# EAGLE board bin-to-dec_tube-driver (EAGLE 9.6.2)
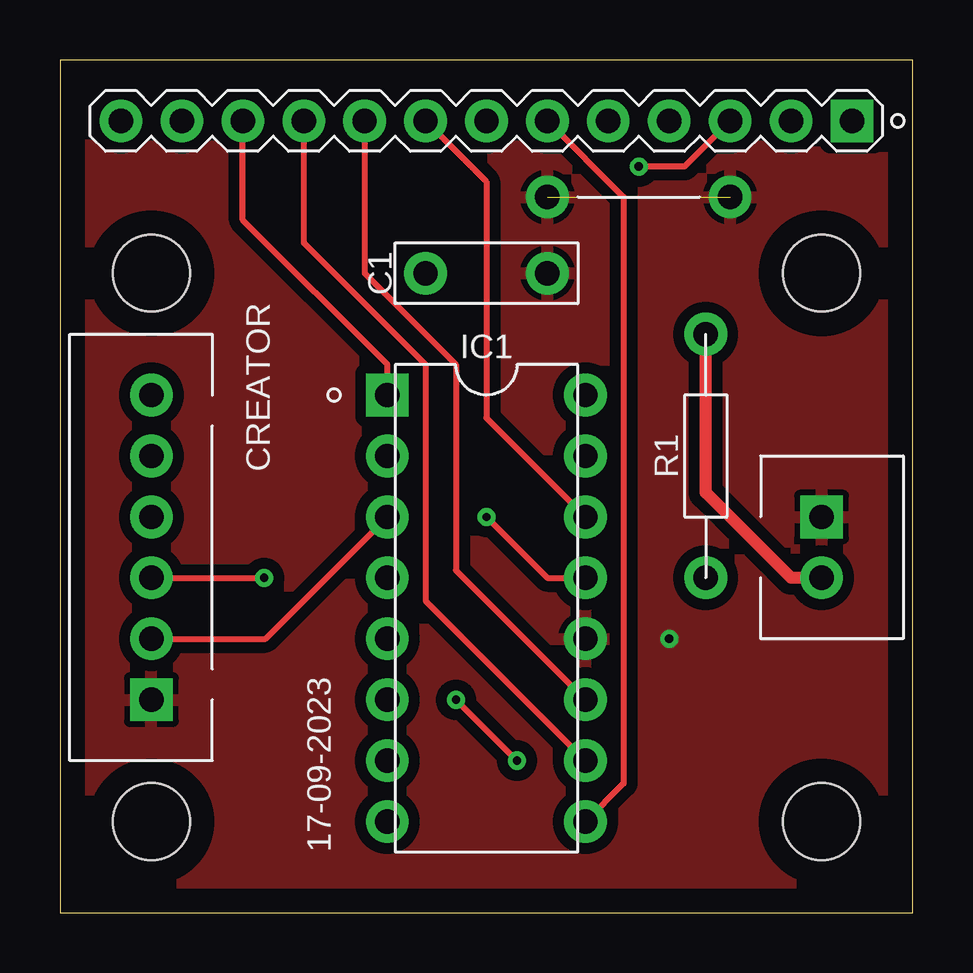
[diagram p0: board, top side]
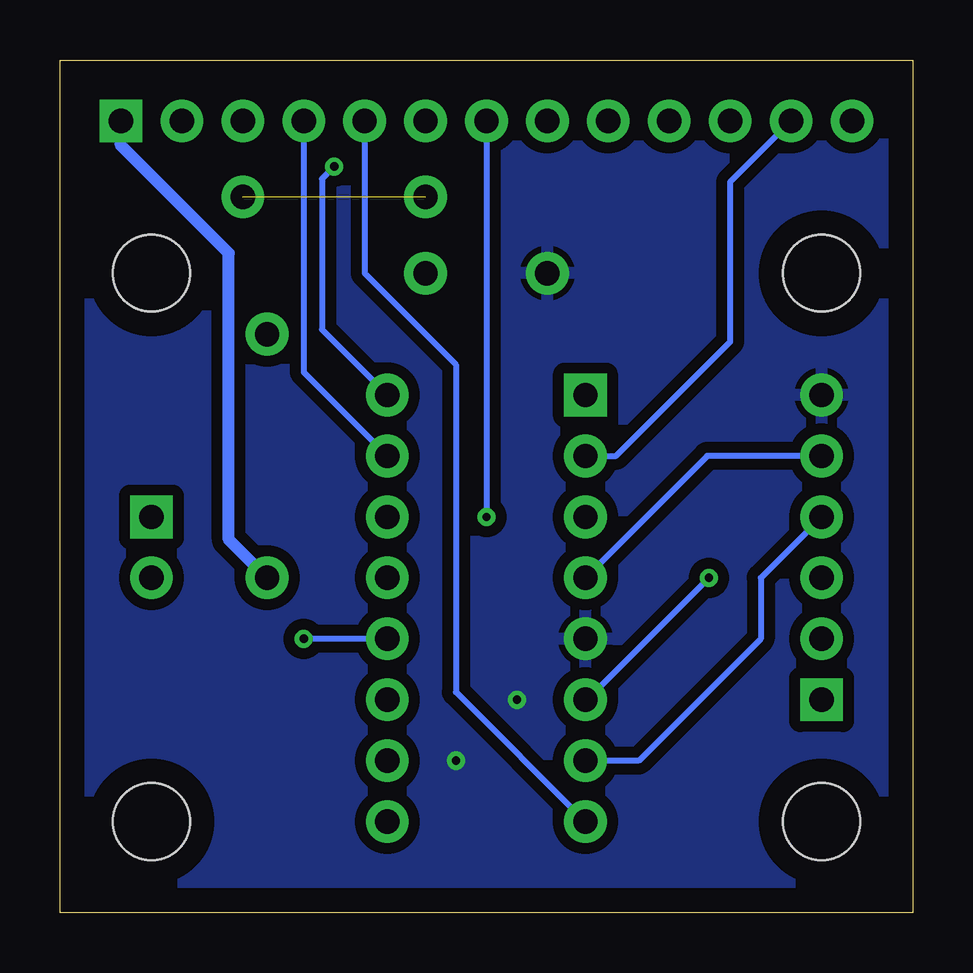
[diagram p1: board, bottom side, seen from below]

Size 35.56 x 35.56 mm. Coordinates in mm from the lower left corner, seen from the top.
Outline: 0,0 35.56,0 35.56,35.56 0,35.56 0,0
Copper layers (1*16): Top 0.035mm / dielectric 1.5mm / Bottom 0.035mm
Design rules "default *": minimum track width 6mil, minimum drill 0.35mm, track to track 18mil, track to pad 18mil, pad to pad 18mil, via to via 18mil, smd to smd 6mil, copper to edge 40mil, drill to drill 6mil, minimum pad ring 10mil, minimum via ring 8mil, stop-mask expansion 4mil, vias tented up to drill 0mil, thermal gap 10mil
Holes 3.2 mm at 31.75,26.67 3.81,26.67 3.81,3.81 31.75,3.81

## Footprints (pad centres in the part's own frame; a part is rotated, then mirrored left to right if it is on the bottom)
CAPACITOR_UNPOLARISED_5.08MM = drill 1.016 pad 1.778: 1 -2.54,0; 2 2.54,0
16-PIN_DIP = drill 1.016 pad 1.778 square: 1 -4.128,8.89 | drill 1.016 pad 1.778: 2 -4.128,6.35; 3 -4.128,3.81; 4 -4.128,1.27; 5 -4.128,-1.27; 6 -4.128,-3.81; 7 -4.128,-6.35; 8 -4.128,-8.89; 9 4.128,-8.89; 10 4.128,-6.35; 11 4.128,-3.81; 12 4.128,-1.27; 13 4.128,1.27; 14 4.128,3.81; 15 4.128,6.35; 16 4.128,8.89
HEADER_13-PIN = drill 1.016 pad 1.778 square: 1 0,0 | drill 1.016 pad 1.778: 2 0,2.54; 3 0,5.08; 4 0,7.62; 5 0,10.16; 6 0,12.7; 7 0,15.24; 8 0,17.78; 9 0,20.32; 10 0,22.86; 11 0,25.4; 12 0,27.94; 13 0,30.48
XH2.54_6-PIN = drill 1.016 pad 1.778 square: 1 -6.35,0 | drill 1.016 pad 1.778: 2 -3.81,0; 3 -1.27,0; 4 1.27,0; 5 3.81,0; 6 6.35,0
XH2.54_2-PIN = drill 1.016 pad 1.778 square: 1 -1.27,0 | drill 1.016 pad 1.778: 2 1.27,0
RESISTOR_10.16MM = drill 1.016 pad 1.778: 1 -5.08,0; 2 5.08,0
WIRE_7.62MM = drill 1.016 pad 1.778: 1 -3.81,0; 2 3.81,0

## Placement (x,y rotation side)
C1  100nf  [CAPACITOR_UNPOLARISED_5.08MM]  17.78,26.67 0 top
CREATOR  Isaac  [INFO_T]  9.53,18.41 90 top
IC1  K155ID1  [16-PIN_DIP]  17.78,12.7 0 top
P1  DEC_OUT  [HEADER_13-PIN]  33.02,33.02 90 top
P2  BIN_IN  [XH2.54_6-PIN]  3.81,15.24 90 top
P3  HV_IN  [XH2.54_2-PIN]  31.75,15.24 270 top
R1  10k  [RESISTOR_10.16MM]  26.92,19.05 90 top
SCHEMATIC1  17-09-2023  [SHEET]  9.53,2.54 90 top
W1  [WIRE_7.62MM]  24.13,29.84 0 top

## Library data of the parts
C1 CREATOR IC1 P1-P3 R1 SCHEMATIC1 W1 = myLibrary

## Nets
0: IC1.16 P1.3
1: IC1.15 P1.4
2: IC1.8 P1.5
3: IC1.9 P1.6
4: IC1.13 P1.7
5: IC1.14 P1.8
6: IC1.11 P1.9
7: IC1.10 P1.10
8: IC1.1 P1.11
9: IC1.2 P1.12
+5V: C1.1 IC1.5 P2.6
+V: P3.2 R1.2
A: IC1.3 P2.2
B: IC1.6 P2.3
C: IC1.7 P2.4
D: IC1.4 P2.5
GND: C1.2 IC1.12 P2.1 P3.1 W1.1 W1.2
N$1: P1.1 R1.1
N$16: P1.2
N$17: P1.13

## Tracks (layer width: path | path; a pad name or v marks a point on that pad's centre or on a via)
0  (via drill 0.35)
  Top 0.254: P1.3 26.04,31.11 v24.13,31.11
  Bottom 0.254: v24.13,31.11 24.64,30.61 24.64,24.32 IC1.16
1
  Bottom 0.254: P1.4 25.4,22.54 IC1.15
2
  Bottom 0.254: P1.5 22.86,26.67 19.05,22.86 19.05,9.21 IC1.8
3
  Top 0.254: P1.6 23.5,29.84 23.5,5.4 IC1.9
4  (via drill 0.35)
  Top 0.254: v17.78,16.51 20.32,13.97 IC1.13
  Bottom 0.254: P1.7 v17.78,16.51
5
  Top 0.254: P1.8 17.78,30.48 17.78,20.64 IC1.14
6
  Top 0.254: P1.9 12.7,26.67 16.51,22.86 16.51,14.29 IC1.11
7
  Top 0.254: P1.10 10.16,27.94 15.24,22.86 15.24,13.02 IC1.10
8
  Top 0.254: IC1.1 13.65,22.86 7.62,28.89 P1.11
9
  Bottom 0.254: IC1.2 12.38,19.05 7.62,23.81 7.62,30.48 P1.12
+5V  (via drill 0.35)
  Top 0.254: v16.51,8.89 v19.05,6.35
  pour Bottom: -1.27,36.83 -1.27,-1.27 36.83,-1.27 36.83,36.83
+V
  Top 0.508: P3.2 30.48,13.97 26.92,17.53 R1.2
A
  Top 0.254: P2.2 8.57,11.43 IC1.3
B  (via drill 0.35)
  Top 0.254: P2.3 v8.51,13.97
  Bottom 0.254: v8.51,13.97 13.59,8.89 IC1.6
C
  Bottom 0.254: P2.4 6.35,13.97 6.35,11.43 11.43,6.35 IC1.7
D
  Bottom 0.254: P2.5 8.57,19.05 IC1.4
GND  (via drill 0.35)  (1 unrouted)
  Bottom 0.254: IC1.12 v25.4,11.43
  pour Top: -2.54,38.1 -2.54,-2.54 38.1,-2.54 38.1,38.1
N$1
  Bottom 0.508: R1.1 28.52,15.57 28.52,27.5 33.02,32 P1.1